# Altium PCB pay-led-pcb.PcbDoc
Units mm, origin at the board's own origin, x right, y up, seen from the top; angles counter-clockwise.
Board outline 128 x 17 mm, 4 copper layers (Top copper, GND, VCC, Bottom copper), stack 0.844 mm thick; 61 components, 61 nets, 206 pads, 25 vias.
Unrouted connection lines stored in the file: 1.
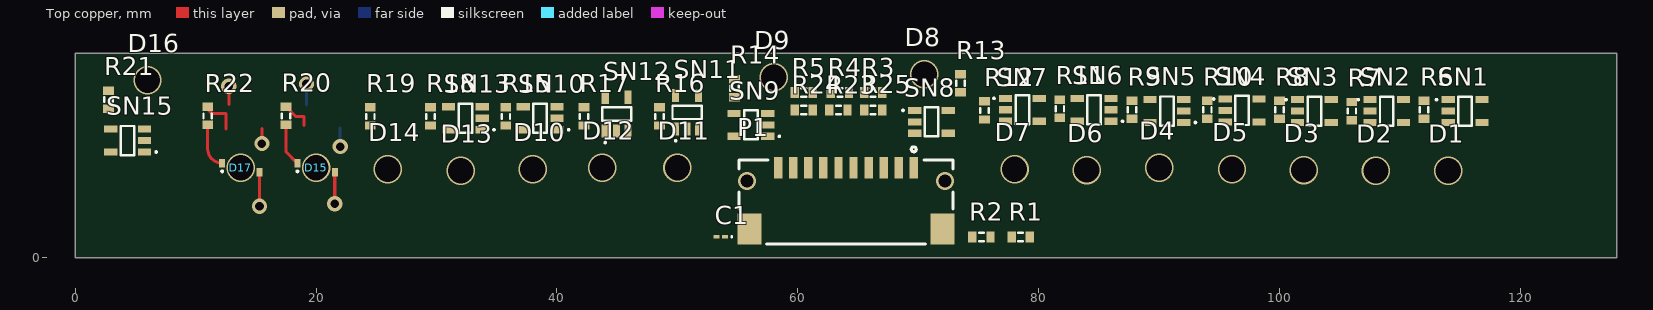
[diagram p0: Top copper view]
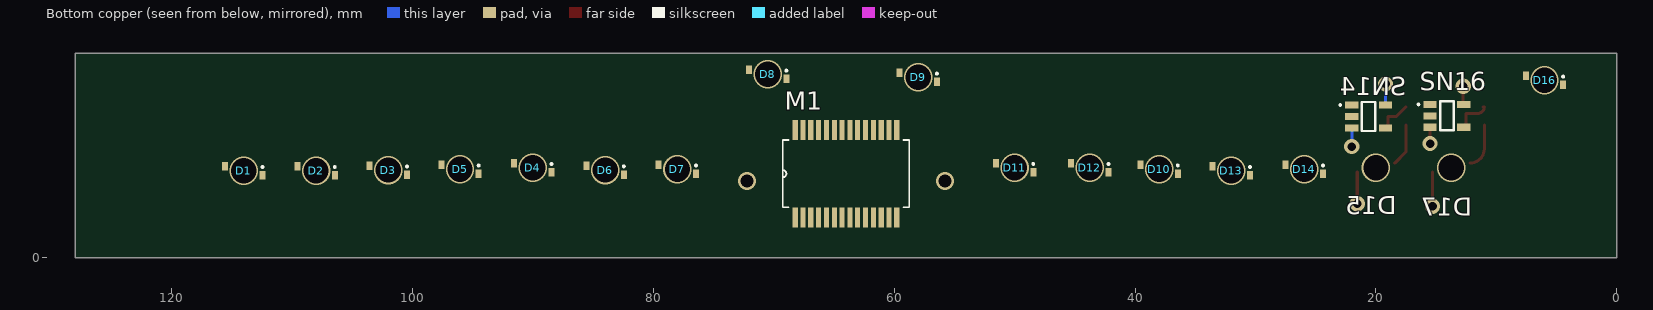
[diagram p1: Bottom copper view, seen from below]
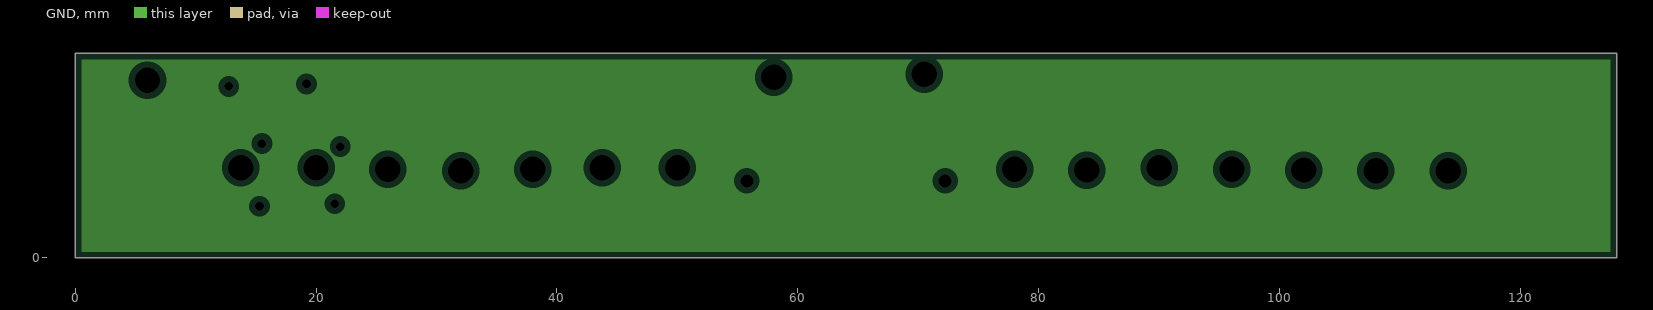
[diagram p2: GND, clearances drawn from the general rule]
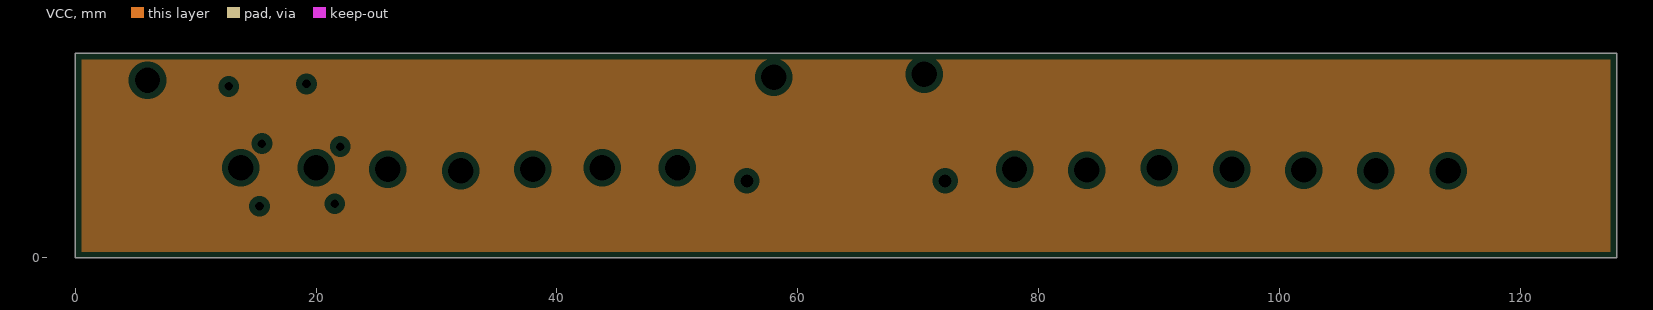
[diagram p3: VCC, clearances drawn from the general rule]

## Layer stack, top to bottom
Top Solder: solder mask 0.0102, Solder Resist, Dk 3.5
Top copper: signal copper 0.0356
Dielectric 1: core 0.32, FR-4, Dk 4.8
GND: plane copper 0.036
Dielectric 3: prepreg 0.127, Dk 4.2
VCC: plane copper 0.036
Dielectric 4: core 0.254, Dk 4.2
Bottom copper: signal copper 0.0356
Bottom Solder: solder mask 0.0102, Solder Resist, Dk 3.5

## Board outline
0,17 128,17 128,0 0,0

## Design rules (kind name [scope] priority, off if disabled: settings)
Clearance [All] p1: gap=0.254 ignorepadtopadclearanceinfootprint=FALSE except(0: Arc-Hole Track-Hole SMDPad-Hole THPad-Hole Via-Hole Fill-Hole Poly-Hole Region-Hole Text-Hole)
PlaneClearance [All] p1: clearance=0.508
PlaneConnect [All] p1: planeconnectstyle=Relief reliefexpansion=0.508 reliefentries=4 reliefconductorwidth=0.254 reliefairgap=0.254
PolygonConnect [All] p1: connectstyle=Relief reliefconductorwidth=0.254 reliefentries=4 polygonreliefangle="90 Angle" airgapwidth=0.254
RoomDefinition RoomDefinition_12 [False vs False] p1: confinementstyle=ConfineIn formatcopy=TRUE lockcomponents=FALSE outline 111,16.25 117.75,16.25 117.75,4.3 111,4.3
RoomDefinition RoomDefinition_11 [False vs False] p2: confinementstyle=ConfineIn formatcopy=TRUE lockcomponents=FALSE outline 105,16.25 111,16.25 111,4.3 105,4.3
RoomDefinition RoomDefinition_10 [False vs False] p3: confinementstyle=ConfineIn formatcopy=TRUE lockcomponents=FALSE outline 99,16.25 105,16.25 105,4.3 99,4.3
RoomDefinition RoomDefinition_9 [False vs False] p4: confinementstyle=ConfineIn formatcopy=TRUE lockcomponents=FALSE outline 93,16.25 99,16.25 99,4.3 93,4.3
RoomDefinition pay-led-pcb [InComponentClass('pay-led-pcb')] p5: confinementstyle=ConfineIn formatcopy=TRUE lockcomponents=FALSE outline 87,16.25 93,16.25 93,4.3 87,4.3
RoomDefinition RoomDefinition_7 [False vs False] p6: confinementstyle=ConfineIn formatcopy=TRUE lockcomponents=FALSE outline 74.75,16.25 81,16.25 81,4.25 74.75,4.25
RoomDefinition RoomDefinition_6 [False vs False] p7: confinementstyle=ConfineIn formatcopy=TRUE lockcomponents=FALSE outline 81,16.25 87,16.25 87,4.25 81,4.25
RoomDefinition RoomDefinition_5 [False vs False] p8: confinementstyle=ConfineIn formatcopy=TRUE lockcomponents=FALSE outline 75.25,16.25 75.25,16
RoomDefinition RoomDefinition_2 [False vs False] p9: confinementstyle=ConfineIn formatcopy=TRUE lockcomponents=FALSE outline 47,15.75 53,15.75 53,2.25 47,2.25
RoomDefinition [False vs False] p10: confinementstyle=ConfineIn formatcopy=TRUE lockcomponents=FALSE outline 41.25,15.75 47,15.75 47,2.25 41.25,2.25
RoomDefinition RoomDefinition_4 [InComponentClass('pay-led-pcb-lorna-v2')] p11: confinementstyle=ConfineIn formatcopy=TRUE lockcomponents=FALSE outline 35,15.75 41.25,15.75 41.25,2.25 35,2.25
RoomDefinition RoomDefinition_3 [InComponentClass('pay-led-pcb-lorna-v2')] p12: confinementstyle=ConfineIn formatcopy=TRUE lockcomponents=FALSE outline 28.75,15.75 35,15.75 35,2.25 28.75,2.25
RoomDefinition RoomDefinition_1 [InComponentClass('pay-led-pcb-lorna-v2')] p13: confinementstyle=ConfineIn formatcopy=TRUE lockcomponents=FALSE outline 16.75,16 23.25,16 23.25,2.5 16.75,2.5
RoomDefinition LED [InComponentClass('All Components')] p14: confinementstyle=ConfineIn formatcopy=TRUE lockcomponents=FALSE outline 10.25,16 16.75,16 16.75,2.5 10.25,2.5
RoomDefinition room1 [All] p15: confinementstyle=ConfineIn formatcopy=TRUE lockcomponents=FALSE outline 129,2 263,2 263,18 129,18
RoutingVias [All] p1: holewidth=0.711 width=1.27 viastyle="Through Hole" minholewidth=0.711 minwidth=1.27 maxholewidth=0.711 maxwidth=1.27
SolderMaskExpansion [All] p1: expansion=0.102
Width [All] p1: maxlimit=0.254 minlimit=0.254 preferedwidth=0.254
28 further rules are at their usual default settings.

## Components (designator, comment, footprint, x,y, rotation, side; value= is the part's Value field where it differs from the comment)
C1 "Cap" 0603 53.6,1.75 r180 top value=100pF
D1 "LED0" "LB P4SG" 114,7.25 r0 top
D2 "LED0" "LB P4SG" 108,7.25 r0 top
D3 "LED0" "LB P4SG" 102,7.3 r0 top
D4 "LED0" "LB P4SG" 90,7.5 r0 top
D5 "LED0" "LB P4SG" 96.05,7.375 r0 top
D6 "LED0" "LB P4SG" 84,7.3 r0 top
D7 "LED0" "LB P4SG" 78,7.375 r0 top
D8 "LED0" "LB P4SG" 70.5,15.25 r0 top
D9 "LED0" "LB P4SG" 58,15 r0 top
D10 "LED0" "LB P4SG" 38,7.375 r0 top
D11 "LED0" "LB P4SG" 50,7.5 r0 top
D12 "LED0" "LB P4SG" 43.75,7.5 r0 top
D13 "LED0" "LB P4SG" 32,7.25 r0 top
D14 "LED0" "LB P4SG" 25.95,7.375 r0 top
D15 "LED0" "LB P4SG" 20,7.5 r0 bottom
D16 "LED0" "LB P4SG" 6,14.75 r0 top
D17 "LED0" "LB P4SG" 13.75,7.5 r0 bottom
M1 "MCP23S17" SOP65P780X200-28N 64,7 r90 bottom
P1 "OUTGOING" DF14-10P-1.25H(55) 64,7.5 r180 top
R1 "Res2" J1-0603 78.5,1.75 r0 top value=1K
R2 "Res2" J1-0603 75.25,1.75 r0 top value=1K
R3 "Res2" J1-0603 66.25,13.75 r0 top value=1K
R4 "Res2" J1-0603 63.5,13.75 r0 top value=1K
R5 "Res2" J1-0603 60.5,13.75 r0 top value=1K
R6 "Res2" J1-0603 112,12.3 r90 top value=1K
R7 "Res2" J1-0603 106,12.2 r90 top value=1K
R8 "Res2" J1-0603 100,12.3 r90 top value=1K
R9 "Res2" J1-0603 87.75,12.3 r90 top value=1K
R10 "Res2" J1-0603 94,12.3 r90 top value=1K
R11 "Res2" J1-0603 81.75,12.4 r90 top value=1K
R12 "Res2" J1-0603 75.5,12.25 r90 top value=1K
R13 "Res2" J1-0603 73.5,14.5 r90 top value=1K
R14 "Res2" J1-0603 54.75,14.1 r90 top value=1K
R15 "Res2" J1-0603 35.75,11.75 r90 top value=1K
R16 "Res2" J1-0603 48.5,11.75 r90 top value=1K
R17 "Res2" J1-0603 42.25,11.75 r90 top value=1K
R18 "Res2" J1-0603 29.5,11.75 r90 top value=1K
R19 "Res2" J1-0603 24.5,11.75 r90 top value=1K
R20 "Res2" J1-0603 17.5,11.8 r90 top value=1K
R21 "Res2" J1-0603 2.75,13.15 r270 top value=1K
R22 "Res2" J1-0603 11,11.8 r90 top value=1K
R23 "Res2" J1-0603 63.375,12.3 r180 top value=1K
R24 "Res2" J1-0603 60.5,12.3 r180 top value=1K
R25 "Res2" J1-0603 66.25,12.3 r180 top value=1K
SN1 "SN74AHC1G08" SOT-23-5_95P290X160-5N 114,13.15 r0 top
SN2 "SN74AHC1G08" SOT-23-5_95P290X160-5N 107.5,13.15 r0 top
SN3 "SN74AHC1G08" SOT-23-5_95P290X160-5N 101.5,13.15 r0 top
SN4 "SN74AHC1G08" SOT-23-5_95P290X160-5N 95.5,13.2 r0 top
SN5 "SN74AHC1G08" SOT-23-5_95P290X160-5N 92.05,11.25 r180 top
SN6 "SN74AHC1G08" SOT-23-5_95P290X160-5N 86,11.35 r180 top
SN7 "SN74AHC1G08" SOT-23-5_95P290X160-5N 77.25,13.25 r0 top
SN8 "SN74AHC1G08" SOT-23-5_95P290X160-5N 69.7,12.25 r0 top
SN9 "SN74AHC1G08" SOT-23-5_95P290X160-5N 57.5,10.1 r180 top
SN10 "SN74AHC1G08" SOT-23-5_95P290X160-5N 40,10.65 r180 top
SN11 "SN74AHC1G08" SOT-23-5_95P290X160-5N 49.85,10.7 r90 top
SN12 "SN74AHC1G08" SOT-23-5_95P290X160-5N 44,10.55 r90 top
SN13 "SN74AHC1G08" SOT-23-5_95P290X160-5N 33.8,10.65 r180 top
SN14 "SN74AHC1G08" SOT-23-5_95P290X160-5N 22,12.7 r180 bottom
SN15 "SN74AHC1G08" SOT-23-5_95P290X160-5N 5.75,8.8 r180 top
SN16 "SN74AHC1G08" SOT-23-5_95P290X160-5N 15.5,12.75 r180 bottom

## Footprints (in the part's own frame and the unit in brackets; to place one, negate y for a bottom-side part, rotate by r counter-clockwise, add the part's x,y. Pads: shape width x height; smd on the part's side, far side on the other; paste and mask are expansions set on the pad)
0603 [mm] "Chip Inductor, Body 0.6x0.3mm, IPC High Density"
  rect 0.5x0.3 smd: 1(-0.35,0) 2(0.35,0)
  silkscreen extent -0.9,-0.05 -0.9,0.05, body extent -0.33,-0.18 0.33,0.18, height 0.55
DF14-10P-1.25H(55) [mm]
  rect 0.7x1.8 smd: 1(-5.625,0) 2(-4.375,0) 3(-3.125,0) 4(-1.875,0) 5(-0.625,0) 6(0.625,0) 7(1.875,0) 8(3.125,0) 9(4.375,0) 10(5.625,0)
  rect 2x2.6 smd: ""(-8.025,5.1) ""(8.025,5.1)
  silkscreen extent -8.89,-1.73 8.89,6.35
J1-0603 [mm] "Chip Resistor, Body 1.6x0.8mm, IPC High Density"
  rect 0.7x0.9 smd: 1(-0.75,0) 2(0.75,0)
  silkscreen extent -0.2,-0.35 0.2,0.35, body extent -0.85,-0.48 0.85,0.48, height 0.9
"LB P4SG" [mm] "Footprint for a reverse-mount Osram LED"
  rect 0.5x0.7 smd far side mask+0.102: 1(-1.55,-0.375) 2(1.55,0.375)
SOP65P780X200-28N [mil]
  rect 65x17 smd: 1(-143,166) 2(-143,141) 3(-143,115) 4(-143,90) 5(-143,64) 6(-143,38) 7(-143,13) 8(-143,-13) 9(-143,-38) 10(-143,-64) 11(-143,-90) 12(-143,-115) 13(-143,-141) 14(-143,-166) 15(143,-166) 16(143,-141) 17(143,-115) 18(143,-90) 19(143,-64) 20(143,-38) 21(143,-13) 22(143,13) 23(143,38) 24(143,64) 25(143,90) 26(143,115) 27(143,141) 28(143,166)
  silkscreen extent -110,-207 110,207
SOT-23-5_95P290X160-5N [mm]
  rect 1.1x0.6 smd: 1(0,0) 2(0,-0.95) 3(0,-1.9) 4(2.8,-1.9) 5(2.8,0)
  silkscreen extent -0.99,-2.16 1.96,0.25

## Part data
C1: "Capacitor", LatestRevisionDate=17-Jul-2002, LatestRevisionNote="Re-released for DXP Platform.", PackageDescription="Radial Cap, Thru-Hole; 2 Leads; 0.3 in Pin Spacing", PackageReference=RAD-0.3, Published=8-Jun-2000, Publisher="Altium Limited"
D1 D2 D3 D4 D5 D6 D7 D8 D9 D10 D11 D12 D13 D14 D15 D16 D17: "Typical INFRARED GaAs LED", LatestRevisionDate=08-Jul-2005, LatestRevisionNote="Mech Layer 1 removed.", PackageDescription="LED; 2 Leads", PackageReference=LED-0, Published=8-Jun-2000, Publisher="Altium Limited"
P1: library part "Header 10", "Header, 10-Pin", LatestRevisionDate=17-Jul-2002, LatestRevisionNote="Re-released for DXP Platform.", Publisher="Altium Limited", Supplier=Digi-Key
R1 R2 R3 R4 R5 R6 R7 R8 R9 R10 R11 R12 R13 R14 R15 R16 R17 R18 R19 R20 R21 R22 R23 R24 R25: "Resistor", LatestRevisionDate=17-Jul-2002, LatestRevisionNote="Re-released for DXP Platform.", PackageDescription="Axial Device, Thru-Hole; 2 Leads; 0.4 in Pin Spacing", PackageReference=AXIAL-0.4, Published=8-Jun-2000, Publisher="Altium Limited"

## Via types
v1: diameter 2.362, hole 2.1, Top copper to Bottom copper, 17 vias
v2: diameter 1.27, hole 0.711, Top copper to Bottom copper, 6 vias
v3: diameter 1.5, hole 1.1, Top copper to Bottom copper, 2 vias

## Nets (pads, with @x,y where several pads share a name; then routed paths per layer and width w, separated by ;. In a path a pad name is that pad's centre, name@x,y a point inside that pad or via, vN(x,y) a via of type N, cw(c..) or ccw(c..) an arc to the next point about the centre after c; other vN are vias at no path point)
3V3: C1.1 M1.9 P1.1 R1.1 R2.1 R4.1 R23.1 R25.1 SN1.5 SN2.5 SN3.5 SN4.5 SN5.5 SN6.5 SN7.5 SN8.5 SN9.5 SN10.5 SN11.5 SN12.5 SN13.5 SN14.5 SN15.5 SN16.5 | length 1.7
  Bottom copper w0.254: SN14.5 v2(19.2,14.45)
CH1: M1.1 SN1.2
CH2: M1.2 SN2.2
CH3: M1.3 SN3.2
CH4: M1.4 SN4.2
CH5: M1.5 SN5.2
CH6: M1.6 SN7.2
CH7: M1.7 SN9.2
CH8: M1.8 SN11.2
CH9: M1.21 SN13.2
CH10: M1.22 SN14.2
CH11: M1.23 SN15.2
CH12: M1.24 SN16.2
CH13: M1.25 SN6.2
CH14: M1.26 SN8.2
CH15: M1.27 SN10.2
CH16: M1.28 SN12.2
GND: C1.2 D1.2 D2.2 D3.2 D4.2 D5.2 D6.2 D7.2 D8.2 D9.2 D10.2 D11.2 D12.2 D13.2 D14.2 D15.2 D16.2 D17.2 M1.10 P1.2 P1.9 R3.1 R5.1 R24.1 SN1.3 SN2.3 SN3.3 SN4.3 SN5.3 SN6.3 SN7.3 SN8.3 SN9.3 SN10.3 SN11.3 SN12.3 SN13.3 SN14.3 SN15.3 SN16.3 | length 7.1
  Top copper w0.254: v2(15.3,4.3) D17.2 ; v2(21.55,4.5) D15.2
  Bottom copper w0.254: v2@15.25,4.25 ccw(c15.25,4.3) v2(15.3,4.3) ; v2(22,9.25) SN14.3
LED_CLK: P1.4 SN1.1 SN2.1 SN3.1 SN4.1 SN5.1 SN6.1 SN7.1 SN8.1 SN9.1 SN10.1 SN11.1 SN12.1 SN13.1 SN14.1 SN15.1 SN16.1
MISO: M1.14 P1.8
MOSI: M1.13 P1.7
NetD1_1: D1.1 R6.1
NetD2_1: D2.1 R7.1
NetD3_1: D3.1 R8.1
NetD4_1: D4.1 R9.1
NetD5_1: D5.1 R10.1
NetD6_1: D6.1 R11.1
NetD7_1: D7.1 R12.1
NetD8_1: D8.1 R13.1
NetD9_1: D9.1 R14.1
NetD10_1: D10.1 R15.1
NetD11_1: D11.1 R16.1
NetD12_1: D12.1 R17.1
NetD13_1: D13.1 R18.1
NetD14_1: D14.1 R19.1
NetD15_1: D15.1 R20.1 | length 3.6
  Top copper w0.254: R20.1 17.5,8.813 D15.1@18.438,7.875
NetD16_1: D16.1 R21.1
NetD17_1: D17.1 R22.1 | length 3.9
  Top copper w0.254: R22.1 11,9.063 ccw(c12.188,9.063) D17.1@12.188,7.875
NetM1_15: M1.15 R24.2 R25.2
NetM1_16: M1.16 R5.2 R23.2
NetM1_17: M1.17 R3.2 R4.2
NetR6_2: R6.2 R19.2 SN1.4
NetR7_2: R7.2 SN2.4
NetR8_2: R8.2 SN3.4
NetR9_2: R9.2 SN4.4
NetR10_2: R10.2 SN5.4
NetR11_2: R11.2 SN6.4
NetR12_2: R12.2 SN7.4
NetR13_2: R13.2 SN8.4
NetR14_2: R14.2 SN9.4
NetR15_2: R15.2 SN10.4
NetR16_2: R16.2 SN11.4
NetR17_2: R17.2 SN12.4
NetR18_2: R18.2 SN13.4
NetR20_2: R20.2 SN14.4 | length 2.6
  Top copper w0.254: R20.2 18.3,11.75 19,11.75 19,11
NetR21_2: R21.2 SN15.4
NetR22_2: R22.2 SN16.4 | length 3.2
  Top copper w0.254: R22.2@11.1,12.55 R22.2 ccw(c11.55,12.55) 11.55,12 12.5,12 12.5,10.7
PEX_C\S\: M1.11 P1.5 R2.2
PEX_R\S\T\: P1.3
PEX_RST: M1.18 R1.2
SCK: M1.12 P1.6
pads on no net: M1.19 M1.20 P1. P1.10
copper on no net: | length 3.4
  Top copper w0.254: 12.75,12.75 v2@12.75,14.75 ; v2@15.5,9.75 15.5,10.75
  Bottom copper w0.254: v2@15.5,9.75 ccw(c15.75,9.75) v2@15.75,9.5
  other v1: 32,7.25 108,7.25 114,7.25 84,7.3 102,7.3 25.95,7.375 38,7.375 78,7.375 96.05,7.375 13.75,7.5 20,7.5 43.75,7.5 50,7.5 90,7.5 6,14.75 58,15 70.5,15.25
  other v2: 15.5,9.5 12.75,14.25
  other v3: 55.775,6.4 72.225,6.4

## Polygon pours and split planes (outlines as drawn)
no net on GND (split plane): 127.49,0.51 0.51,0.51 0.51,16.49 127.49,16.49
no net on VCC (split plane): 127.49,0.51 0.51,0.51 0.51,16.49 127.49,16.49

## Silkscreen, mask and mechanical layers (free items; w line width, h text height)
Mechanical 1:
  circle w0.254: c26,7.5 r2.5
  circle w0.254: c20,7.5 r2.5
  circle w0.254: c6,15.5 r2.5
  circle w0.254: c114,7.5 r2.5
  circle w0.254: c108,7.5 r2.5
  circle w0.254: c102,7.5 r2.5
  circle w0.254: c96,7.5 r2.5
  circle w0.254: c90,7.5 r2.5
  circle w0.254: c84,7.5 r2.5
  circle w0.254: c78,7.5 r2.5
  circle w0.254: c70,15.5 r2.54
  circle w0.254: c58,15.5 r2.55
  circle w0.254: c50,7.5 r2.5
  circle w0.254: c44,7.5 r2.5
  circle w0.254: c38,7.5 r2.5
  circle w0.254: c32,7.5 r2.5
  circle w0.254: c13.75,7.5 r2.5
  lines w0.254: 11.5,7.5 116.459,7.5
  text "String" at 0,36 h1.52

## Dimensions
0,0 to 0,27.051 on Bottom Overlay
0,0 to 128.016,0 on Bottom Overlay